# Allegro board SENTINEL_FALL_V01.brd
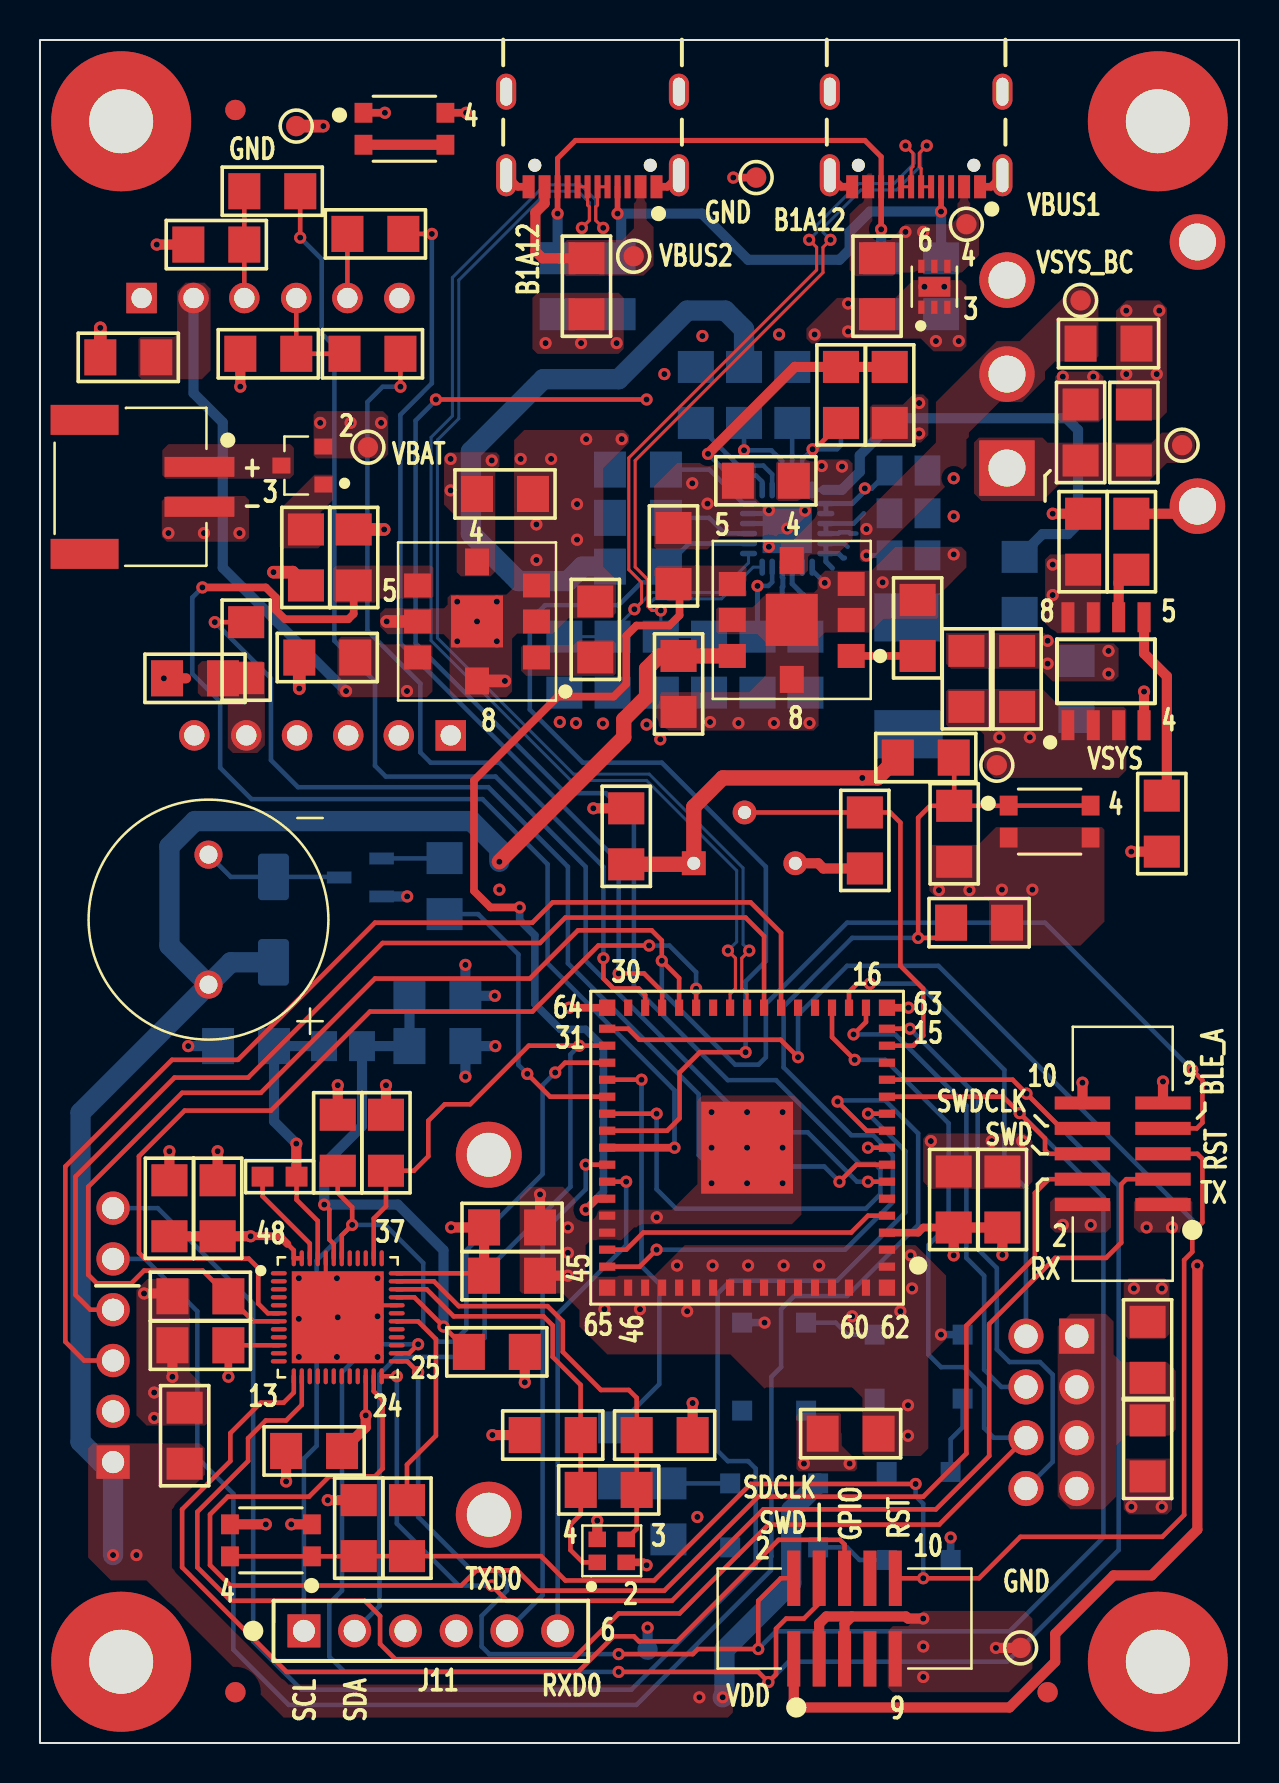
[diagram p0: board, top side]
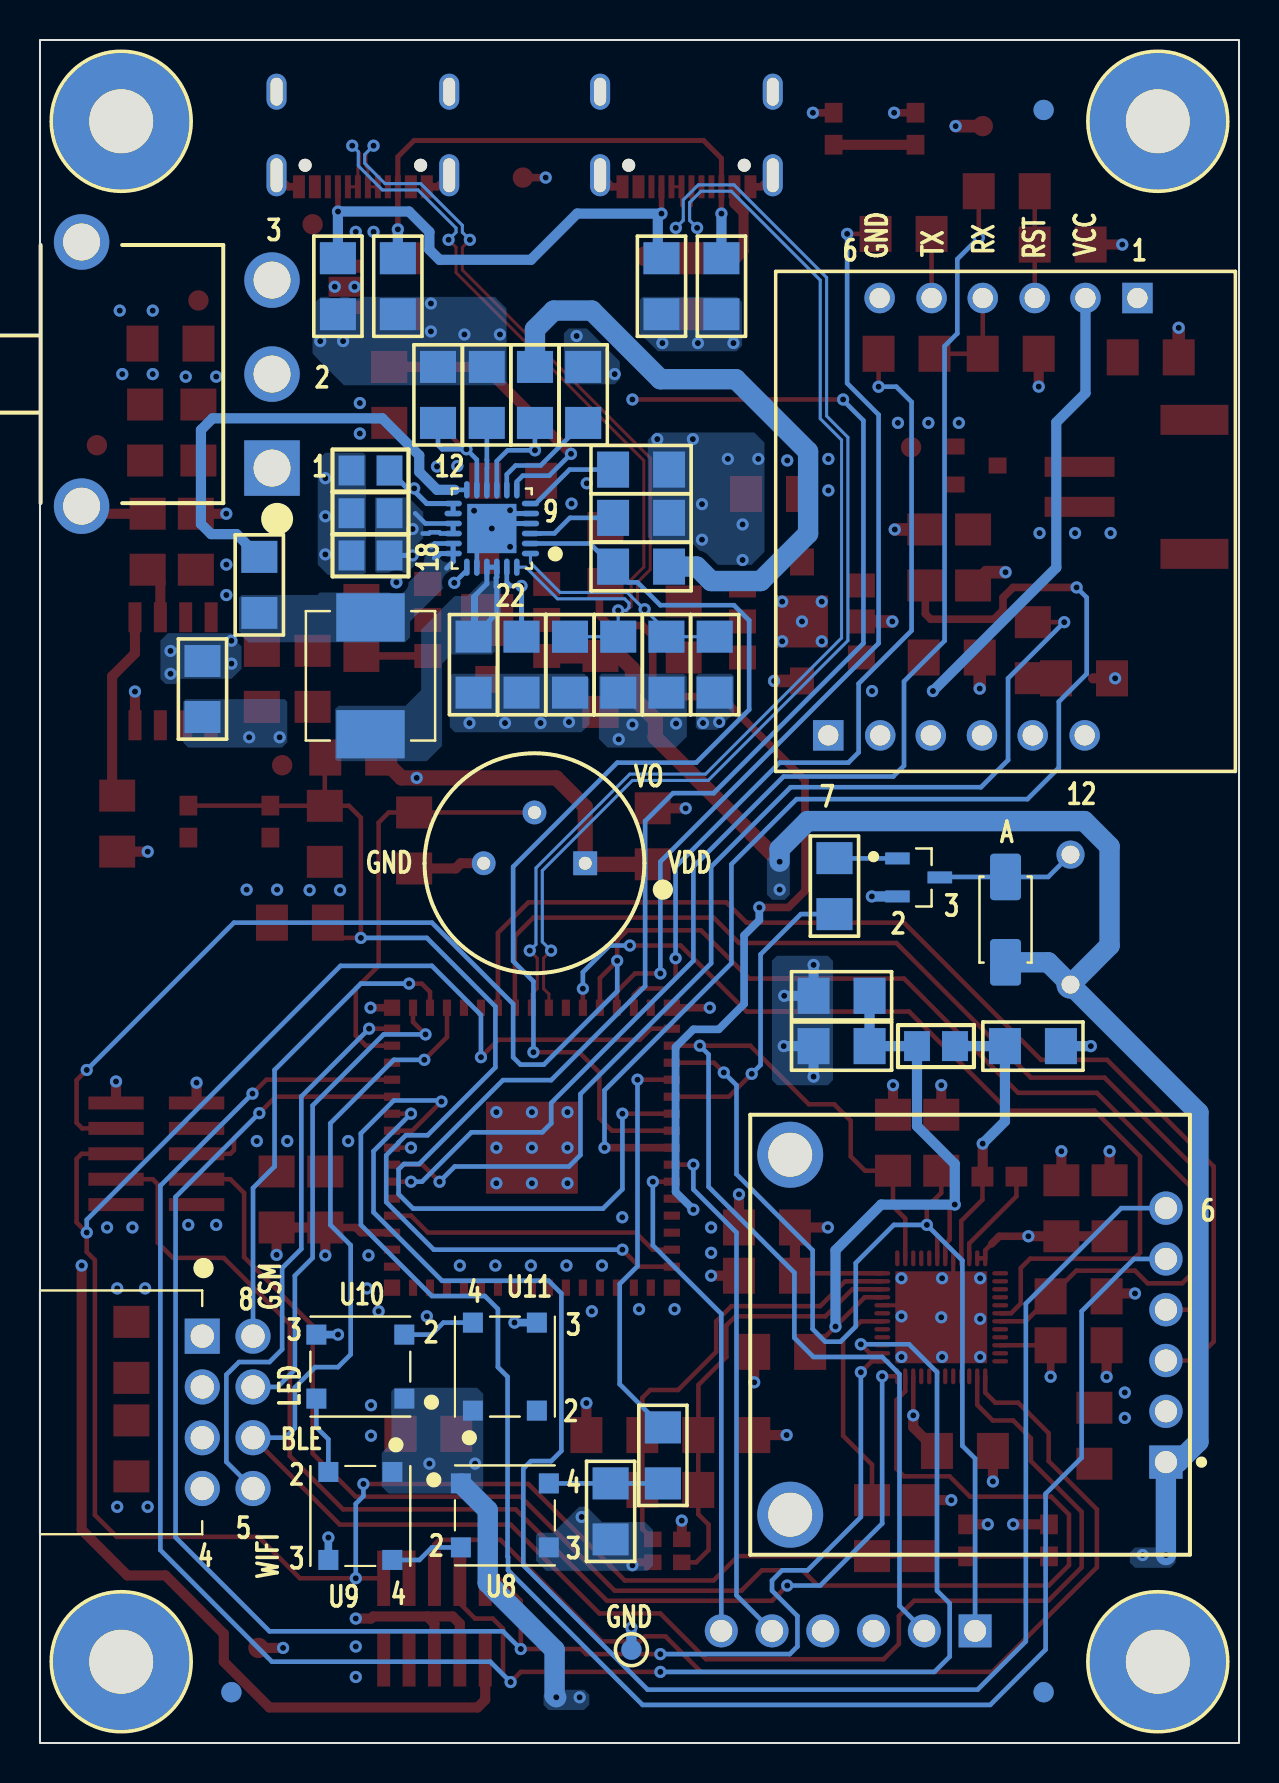
[diagram p1: board, bottom side, seen from below]

Outline 60 x 85.16 mm; copper layers: TOP, GND, GND/PWR, BOTTOM. Coordinates in mm from the lower left corner of the outline.
Outline path: rectangle 0,0 60,85.16

## Design rules (mm)
constraint set DEFAULT: min track width 0.229
net group DIFFPAIR0: nets PGM_D+ PGM_D-
net group DIFFPAIR1: nets POWER_D+ POWER_D-
nets with their own width: min track width 0.203; nets GND
nets with their own width: min track width 0.229; nets VLDO_3V3
nets with their own width: min track width 0.762; nets VSW_5V0

## Placement (name value [footprint] x y rotation side)
C1  10uF  [C1206]  41.88 72.85 270 top
C2  1uF  [C1206]  35.9 53.92 270 bottom
C3  4.7uF  [C1206]  53.47 69.98 0 top
C4  10uF  [C1206]  38.3 53.92 90 bottom
C5  47nF  [C1206]  49.02 57.91 90 bottom
C6  4.7uF  [C1206]  54.74 65.53 90 top
C7  22uF  [C0805]  43.46 61.49 0 bottom
C8  22uF  [C0805]  43.46 59.39 0 bottom
C9  22uF  [C0805]  43.46 63.63 0 bottom
C10  4.7uF  [C1206]  40.08 67.41 90 bottom
C11  10uF  [C1206]  36.32 63.12 0 top
C12  10uF  [C1206]  23.27 62.46 180 top
C13  47uF  [C1206]  31.95 52.96 270 top
C14  47uF  [C1206]  14.38 54.28 180 top
C15  10uF  [C1206]  52.2 60.07 90 top
C16  100nF  [C1206]  51.87 52.7 90 bottom
C17  1uF  [C1206]  46.35 53.21 90 top
C18  10uF  [C1206]  45.72 27.18 270 top
C20  10uF  [C1206]  48.16 27.18 270 top
C21  10uF  [C1206]  4.42 69.29 0 top
C23  10uF  [C1206]  8.89 26.74 90 top
C24  10uF  [C1206]  13.72 14.61 180 top
C25  100nF  [C1206]  23.62 25.78 0 top
C26  100nF  [C1206]  6.48 26.74 90 top
C27  100nF  [C1206]  23.62 23.37 0 top
C28  100nF  [C1206]  8.03 19.89 180 top
C29  2.2uF  [C1206]  10.31 34.85 180 bottom
C30  100nF  [C1206]  15.95 10.74 90 top
C31  2.2uF  [C1206]  22.86 19.56 0 top
C32  10nF  [C1206]  19.89 37.36 0 bottom
C33  18pF  [C1206]  19.89 34.85 0 bottom
C35  18pF  [C1206]  25.66 15.4 180 top
C36  18pF  [C1206]  31.26 15.4 0 top
C37  10uF  [C1206]  27.34 72.85 270 top
C38  10uF  [C1206]  45.75 45.47 90 top
C39  10uF  [C1206]  48.9 53.21 270 top
C71  10uF  [C1206]  40.56 15.47 0 top
C72  10uF  [C1206]  29.34 45.34 270 top
C73  4.7uF  [C1206]  55.42 14.73 90 top
C74  100nF  [C1206]  54.61 60.07 90 top
C75  10uF  [C1206]  7.24 15.37 270 top
C76  100nF  [C1206]  46.99 41.02 0 top
D2  DIODE  [DIOM5226X230N]  11.68 41.17 90 bottom
FB1  120R, 0.2A  [F0805]  15.16 34.85 0 bottom
FD1  TEST POINT_SMD  [40-T_GLOBAL_FID]  9.78 2.54 0 top
FD2  TEST POINT_SMD  [40-T_GLOBAL_FID]  9.78 2.54 180 bottom
FD3  TEST POINT_SMD  [40-T_GLOBAL_FID]  50.42 2.54 180 bottom
FD4  TEST POINT_SMD  [40-T_GLOBAL_FID]  50.42 2.54 0 top
FD5  TEST POINT_SMD  [40-T_GLOBAL_FID]  9.78 81.66 0 top
FD6  TEST POINT_SMD  [40-T_GLOBAL_FID]  9.78 81.66 180 bottom
J1  USB4105-GF-A  [GCT_USB4105-GF-A]  43.84 82.58 180 top
J5  2X5 HDR JLINK  [CNC_3220-10-0300-00]  54.18 29.46 90 top
J6  2X5 HDR JLINK  [CNC_3220-10-0300-00]  40.26 6.22 0 top
J7  HEADER 2/SM_5  [JST_S2B-PH-SM4-TB]  7.98 62.81 90 top
J8  USB4105-GF-A  [GCT_USB4105-GF-A]  27.65 82.58 180 top
J11  PH1-06-UA  [HDRV6W64P0X254_1X6_1524X250X952P]  13.21 5.61 0 top
L1  1uH  [IND_IHLP2525CZER1R0M01]  43.46 53.37 90 bottom
L2  4.7uH  [L0603]  11.99 28.32 0 top
NOREF  -  []  60 0 90 top
NOREF#2  -  []  0 0 0 top
R2  10K  [R1206]  42.09 72.85 270 bottom
R3  10K  [R1206]  45.09 72.85 270 bottom
R4  4K7  [R1206]  29.92 58.83 0 bottom
R5  4K7  [R1206]  35.23 67.41 270 bottom
R6  4K7  [R1206]  28.65 53.92 90 bottom
R7  4K7  [R1206]  31.06 53.92 90 bottom
R8  4K7  [R1206]  26.24 53.92 270 bottom
R9  4K7  [R1206]  33.48 53.92 270 bottom
R10  0R  [R1206]  32.82 67.41 90 bottom
R11  1M  [R1206]  29.92 63.68 180 bottom
R12  4K7  [R1206]  37.64 67.41 90 bottom
R13  0R  [R1206]  29.92 61.26 180 bottom
R14  10K  [R1206]  40.08 67.41 90 top
R15  10K  [R1206]  42.52 67.41 270 top
R16  4K7  [R1206]  31.7 59.36 90 top
R17  1.05K, 0p1%  [R1206]  43.92 55.76 90 top
R18  6.8K,0p1%  [R1206]  27.79 55.68 90 top
R19  4K7  [R1206]  15.7 59.28 90 top
R23  1K  [R1206]  31.45 11.58 270 bottom
R24  4K7  [R1206]  44.32 49.28 0 top
R26  100R  [R1206]  20.24 42.85 90 bottom
R27  4K7  [R1206]  18.36 10.74 270 top
R28  4K7  [R1206]  14.9 30.02 90 top
R29  4K7  [R1206]  17.31 30.02 90 top
R30  4K7  [R1206]  55.42 19.66 270 top
R31  1M  [R1206]  28.46 12.66 0 top
R32  10K  [R1206]  13.31 59.28 270 top
R33  10K  [R1206]  25.9 72.85 270 bottom
R34  10K  [R1206]  28.9 72.85 270 bottom
R35  4K7  [R1206]  8.03 22.34 180 top
R36  500m  [R1206]  52.07 65.53 90 top
R37  1K  [R1206]  16.78 75.46 180 top
R39  1K  [R1206]  16.64 69.47 180 top
R40  1K  [R1206]  11.62 77.6 0 top
R41  1K  [R1206]  10.32 54.65 90 top
R42  5k6  [R1206]  11.42 69.47 0 top
R43  5k6  [R1206]  8.82 74.93 0 top
R44  5k6  [R1206]  7.76 53.24 0 top
R45  1K  [R1206]  41.27 45.13 90 top
R46  4K7  [R1206]  56.13 45.97 270 top
R47  100R  [R1206]  28.83 14.38 270 bottom
SW1  -  [500SSP3S1M6QEA]  48.39 63.75 270 bottom
SW6  SW_TC_SPST_1  [KMR221_CNK]  50.52 46.08 0 top
SW7  SW_TC_SPST_1  [KMR221_CNK]  18.24 80.72 0 top
SW8  SW_TC_SPST_1  [KMR221_CNK]  11.56 10.13 180 top
SW9  -  [BD04AV]  51.88 20.35 270 bottom
TP2  TEST POINT_2  [TP40]  46.35 75.95 0 top
TP3  TEST POINT_2  [TP40]  52.07 72.14 180 top
TP4  TEST POINT_2  [TP40]  12.82 80.85 0 top
TP6  T POINT R  [MH7P5_3P2T]  4.06 81.1 0 top
TP12  TEST POINT_2  [TP40]  16.41 64.8 0 top
TP13  TEST POINT_2  [TP40]  29.71 74.35 0 top
TP14  TEST POINT_2  [TP40]  30.4 4.67 0 bottom
TP15  TEST POINT_2  [TP40]  49.07 4.76 0 top
TP16  TEST POINT_2  [TP40]  35.83 78.28 0 top
TP17  T POINT R  [MH7P5_3P2T]  4.06 4.06 0 top
TP18  T POINT R  [MH7P5_3P2T]  55.93 81.1 0 top
TP19  T POINT R  [MH7P5_3P2T]  55.93 4.06 0 top
TP20  TEST POINT_2  [TP40]  57.15 64.9 0 top
TP21  TEST POINT_2  [TP40]  47.88 48.9 0 top
U1  TVS DIODE  [SON65P200X200X80-7N]  44.75 72.82 90 top
U2  BQ25886RGE  [QFN50P400X400X100-25N]  37.39 60.73 0 bottom
U3  MYLSM00502ERPL  [MURATA_MYLSM00502ERPL]  37.62 56.16 180 top
U4  MYLSM00502ERPL  [MURATA_MYLSM00502ERPL]  21.87 56.08 180 top
U5  MCP1727-3302ESN  [SOIC127P600X175-8N]  53.34 53.59 90 top
U6  ESP32-S3-MINI  [ESP32-S3-MINI-1U_EXP]  35.38 29.77 180 top
U7  -  [SIM8000L]  17.98 50.39 90 bottom
U8  IN-PI55QATPRPGPBPW-40  [INPI55QATPRPGPBPW30]  36.74 11.38 180 bottom
U9  IN-PI55QATPRPGPBPW-40  [INPI55QATPRPGPBPW30]  43.97 11.35 270 bottom
U10  IN-PI55QATPRPGPBPW-40  [INPI55QATPRPGPBPW30]  43.97 18.82 0 bottom
U11  IN-PI55QATPRPGPBPW-40  [INPI55QATPRPGPBPW30]  36.74 18.82 90 bottom
U12  BC818-40LT1G  [SOT95P237X111-3N]  16.03 43.28 180 bottom
U13  AT-1224-TWT-5V-2-R  [XDCR_AT-1224-TWT-5V-2-R]  8.43 41.17 180 top
U14  NRF54L15-QFAA-R  [QFN40P600X600X90-49N]  14.9 21.29 0 top
U15  -  [SEN0623]  3.66 14.05 0 bottom
U16  -  [EKMB1101111]  32.72 43.99 180 bottom
U17  SSM3J332R  [SOT95P240X88-3N]  13.13 63.88 90 top
X1  32 MHz  [XTAL_ABM11W-330000MHZ-8-D1X-T3]  28.61 9.61 90 top

## Library data of the parts
C1 C37 = CAP_CER_10uF_50V_1206_X7R_10P
C2 C17 = CAP_1UF_25V_1206_10P0
C3 C6 C10 C73 = CAP_CER_4700nF_50V_X7R_1206
C4 C11 C12 C15 C18 C20 C21 C23 C24 C38 C39 C71 C72 C75 = CAP_10UF_50V X7T_1206
C5 = 8_CAP_47nF_1206
C7-C9 = 4_CAP_ 22uF 20% X5R_0805 35VDC
C13 C14 = CAP_CER_47UF_16V_X5R_1206
C16 C25-C28 C30 C74 C76 = CAP_100nF_50V_1206_X7R
C29 C31 = CAP_CER_2.2UF_16V_X7R_1206
C32 = 7_CAP_10nF_10p_50V
C33 C35 C36 = CAP_18PF_125V_1206
D2 = B260A-13-F
FB1 = FB_120R_200mA_0805
FD1-FD6 = TEST POINT_SMD_0: room: NTBM
J1 J8 = CONN_USB_USB4105-GF-A
J5 J6 = HEADER_10_2X5_SHROUDED
J7 = HEADER 2/SM_5
J11 = HEADER_6_6X1_MALE
L1 = IND_1uH_11A_1_ukpkg
L2 = IND_4.7UH_350MA_500MOHM_SM
R2 R3 R14 R15 R32-R34 = RES_10K_1W4_1P0_1206
R4-R9 R12 R16 R19 R24 R27-R30 R35 R46 = RES_4K7_1W4_1P0_1206
R10 R13 = RES_0R0_1W4_1P0_1206
R11 R31 = RES_1M_1W2_0P1_1206
R17 = RES_1P05K_0W52_0P1_1206
R18 = RES_6P8K_1W4_0P1_1206
R23 R37 R39-R41 R45 = RES_1K_1W4_1P0_1206
R26 R47 = RES_100R_1W8_1P0_1206
R36 = RES_500mOHM_1W2_1P0_1206
R42-R44 = RES_GENRIC_5k6_1W4_1P0_1206
SW1 = SWITH_PWR_RA_0
SW6-SW8 = SW_TC_SPST_1: Tolerance: TOL; User Part Number: PN
SW9 = SW_RA_DIP
TP2-TP4 TP12-TP16 TP20 TP21 = TEST POINT_2
TP6 TP17-TP19 = T POINT R
U1 = IC_TVS_DIODE
U2 = BQ25886RGER
U3 U4 = MYLSM00502ERPL
U5 = MCP1727-3302ESN
U6 = ESP32-S3-MINI
U7 = SIP_IC_SIM800L_0
U8-U11 = IN-PI55QATPRPGPBPW-40
U12 = NPN_TRANSISTOR_BC818-40LT1G
U13 = BUZZER_AT-1224-TWT-5V-2-R
U14 = NRF54L15-QFAA-R
U15 = SIP_SEN0623
U16 = PIR_SIP_EKMB1101111
U17 = SSM3J332R,LF
X1 = XTAL_32MHZ

## Footprints (pads in the part's own frame, mm; a bottom-side part is the same pattern mirrored in y, then rotated)
40-T_GLOBAL_FID
  round 1.016 smd: 1(0,0)
500SSP3S1M6QEA
  rect 2.775x2.775 hole 1.85: 1(0,0)
  round 2.775 hole 1.85: 2(-4.7,0) 3(-9.4,0) MH1(1.905,-9.53) MH2(-11.305,-9.53)
BD04AV
  rect 1.755x1.755 hole 1.17: 1(0,0)
  round 1.755 hole 1.17: 2(2.54,0) 3(5.08,0) 4(7.62,0) 5(7.62,2.54) 6(5.08,2.54) 7(2.54,2.54) 8(0,2.54)
C0805
  rect 1.295x1.499 smd: 1(-0.95,0) 2(0.95,0)
C1206
  rect 1.6x1.803 smd: 1(-1.4,0) 2(1.4,0)
CNC_3220-10-0300-00
  rect 0.65x2.77 smd: 1(-2.54,-2.015) 2(-2.54,2.015) 3(-1.27,-2.015) 4(-1.27,2.015) 5(0,-2.015) 6(0,2.015) 7(1.27,-2.015) 8(1.27,2.015) 9(2.54,-2.015) 10(2.54,2.015)
DIOM5226X230N
  custom 2.33x1.55 smd: 1(-2.135,0) 2(2.135,0)
EKMB1101111
  rect 1.192x1.192 hole 0.65: 1(0,0)
  round 1.192 hole 0.65: 2(-2.54,2.54) 3(-5.08,0)
ESP32-S3-MINI-1U_EXP
  rect 0.813x0.406 smd: 1(-7,5.95) 2(-7,5.1) 3(-7,4.25) 4(-7,3.4) 5(-7,2.55) 6(-7,1.7) 7(-7,0.85) 8(-7,0) 9(-7,-0.85) 10(-7,-1.7) 11(-7,-2.55) 12(-7,-3.4) 13(-7,-4.25) 14(-7,-5.1) 15(-7,-5.95) 31(7,-5.95) 32(7,-5.1) 33(7,-4.25) 34(7,-3.4) 35(7,-2.55) 36(7,-1.7) 37(7,-0.85) 38(7,0) 39(7,0.85) 40(7,1.7) 41(7,2.55) 42(7,3.4) 43(7,4.25) 44(7,5.1) 45(7,5.95)
  rect 0.406x0.813 smd: 16(-5.95,-7) 17(-5.1,-7) 18(-4.25,-7) 19(-3.4,-7) 20(-2.55,-7) 21(-1.7,-7) 22(-0.85,-7) 23(0,-7) 24(0.85,-7) 25(1.7,-7) 26(2.55,-7) 27(3.4,-7) 28(4.25,-7) 29(5.1,-7) 30(5.95,-7) 46(5.95,7) 47(5.1,7) 48(4.25,7) 49(3.4,7) 50(2.55,7) 51(1.7,7) 52(0.85,7) 53(0,7) 54(-0.85,7) 55(-1.7,7) 56(-2.55,7) 57(-3.4,7) 58(-4.25,7) 59(-5.1,7) 60(-5.95,7)
  rect 4.6x4.6 smd: 61(0,0)
  rect 0.813x0.813 smd: 62(-7,7) 63(-7,-7) 64(7,-7) 65(7,7)
F0805
  rect 1.295x1.499 smd: 1(-0.95,0) 2(0.95,0)
GCT_USB4105-GF-A
  round 0.65 hole 0.65 unplated: (-2.89,3.68) (2.89,3.68)
  rect 0.6x1.15 smd: A1B12(-3.2,4.755) A4B9(-2.4,4.755) B1A12(3.2,4.755) B4A9(2.4,4.755)
  rect 0.3x1.15 smd: A5(-1.25,4.755) A6(-0.25,4.755) A7(0.25,4.755) A8(1.25,4.755) B5(1.75,4.755) B6(0.75,4.755) B7(-0.75,4.755) B8(-1.75,4.755)
  oval 1x2.1 hole 0.6x1.7: S1(-4.32,4.18) S2(4.32,4.18)
  oval 1x1.8 hole 0.6x1.4: S3(-4.32,0) S4(4.32,0)
HDRV6W64P0X254_1X6_1524X250X952P
  rect 1.65x1.65 hole 1.1: 1(0,0)
  round 1.65 hole 1.1: 2(2.54,0) 3(5.08,0) 4(7.62,0) 5(10.16,0) 6(12.7,0)
IND_IHLP2525CZER1R0M01
  rect 2.413x3.429 smd: 1(-2.921,0) 2(2.921,0)
INPI55QATPRPGPBPW30
  rect 1x1 smd: 1(-2.2,1.6) 2(-2.2,-1.6) 3(2.2,-1.6) 4(2.2,1.6)
JST_S2B-PH-SM4-TB
  rect 1.5x3.4 smd: (-3.35,5.75) (3.35,5.75)
  rect 1x3.5 smd: 1(1,0) 2(-1,0)
KMR221_CNK
  rect 0.889x0.991 smd: 1(-2.05,0.8) 2(-2.05,-0.8) 3(2.05,-0.8) 4(2.05,0.8)
L0603
  rect 1.092x0.991 smd: 1(-0.85,0) 2(0.85,0)
MH7P5_3P2T
  round 7 hole 3.2: 1(0,0)
MURATA_MYLSM00502ERPL
  rect 1.35x1.2 smd: 1(-2.975,1.8) 2(-2.975,0) 3(-2.975,-1.8) 5(2.975,-1.8) 6(2.975,0) 7(2.975,1.8)
  rect 1.2x1.35 smd: 4(0,-2.975) 8(0,2.975)
  rect 2.6x2.6 smd: 9(0,0)
QFN40P600X600X90-49N
  oval 0.8x0.216 smd: 1(-2.95,2.2) 2(-2.95,1.8) 3(-2.95,1.4) 4(-2.95,1) 5(-2.95,0.6) 6(-2.95,0.2) 7(-2.95,-0.2) 8(-2.95,-0.6) 9(-2.95,-1) 10(-2.95,-1.4) 11(-2.95,-1.8) 12(-2.95,-2.2) 25(2.95,-2.2) 26(2.95,-1.8) 27(2.95,-1.4) 28(2.95,-1) 29(2.95,-0.6) 30(2.95,-0.2) 31(2.95,0.2) 32(2.95,0.6) 33(2.95,1) 34(2.95,1.4) 35(2.95,1.8) 36(2.95,2.2)
  oval 0.216x0.8 smd: 13(-2.2,-2.95) 14(-1.8,-2.95) 15(-1.4,-2.95) 16(-1,-2.95) 17(-0.6,-2.95) 18(-0.2,-2.95) 19(0.2,-2.95) 20(0.6,-2.95) 21(1,-2.95) 22(1.4,-2.95) 23(1.8,-2.95) 24(2.2,-2.95) 37(2.2,2.95) 38(1.8,2.95) 39(1.4,2.95) 40(1,2.95) 41(0.6,2.95) 42(0.2,2.95) 43(-0.2,2.95) 44(-0.6,2.95) 45(-1,2.95) 46(-1.4,2.95) 47(-1.8,2.95) 48(-2.2,2.95)
  rect 4.6x4.6 smd: 49(0,0)
QFN50P400X400X100-25N
  oval 0.864x0.279 smd: 1(-1.935,1.25) 2(-1.935,0.75) 3(-1.935,0.25) 4(-1.935,-0.25) 5(-1.935,-0.75) 6(-1.935,-1.25) 13(1.935,-1.25) 14(1.935,-0.75) 15(1.935,-0.25) 16(1.935,0.25) 17(1.935,0.75) 18(1.935,1.25)
  oval 0.279x0.864 smd: 7(-1.25,-1.935) 8(-0.75,-1.935) 9(-0.25,-1.935) 10(0.25,-1.935) 11(0.75,-1.935) 12(1.25,-1.935) 19(1.25,1.935) 20(0.75,1.935) 21(0.25,1.935) 22(-0.25,1.935) 23(-0.75,1.935) 24(-1.25,1.935)
  rect 2.464x2.464 smd: 25(0,0)
R1206
  rect 1.6x1.803 smd: 1(-1.4,0) 2(1.4,0)
SEN0623
  rect 1.665x1.665 hole 1.11: 1(0,0)
  round 1.665 hole 1.11: 2(0,-2.54) 3(0,-5.08) 4(0,-7.62) 5(0,-10.16) 6(0,-12.7)
  round 3.3 hole 2.2: 7(18.8,-15.37) 8(18.8,2.63)
SIM8000L
  rect 1.524x1.524 hole 1.016: 1(21.87,-12.9) 7(0,2.57)
  round 1.524 hole 1.016: 2(21.87,-10.3) 3(21.87,-7.76) 4(21.87,-5.16) 5(21.87,-2.6) 6(21.87,0) 8(0,-0.03) 9(0,-2.56) 10(0,-5.12) 11(0,-7.66) 12(0,-10.26)
SOIC127P600X175-8N
  rect 1.5x0.65 smd: 1(-2.7,1.905) 2(-2.7,0.635) 3(-2.7,-0.635) 4(-2.7,-1.905) 5(2.7,-1.905) 6(2.7,-0.635) 7(2.7,0.635) 8(2.7,1.905)
SON65P200X200X80-7N
  rect 0.66x0.32 smd: 1(-1.025,0.65) 2(-1.025,0) 3(-1.025,-0.65) 4(1.025,-0.65) 5(1.025,0) 6(1.025,0.65)
  rect 1x1.6 smd: 7(0,0)
SOT95P237X111-3N
  rect 1.232x0.597 smd: 1(-1.06,0.95) 2(-1.06,-0.95) 3(1.06,0)
SOT95P240X88-3N
  rect 0.8x0.9 smd: 1(-0.95,-1.05) 2(0.95,-1.05) 3(0,1.05)
TP40
  round 1.02 smd: 1(0,0)
XDCR_AT-1224-TWT-5V-2-R
  round 1.408 hole 0.9: 1(0,3.25) 2(0,-3.25)
XTAL_ABM11W-330000MHZ-8-D1X-T3
  rect 0.775x0.875 smd: 1(-0.575,0.725) 2(-0.575,-0.725) 3(0.575,-0.725) 4(0.575,0.725)

## Nets
GND: C1.2 C2.2 C3.2 C4.1 C6.2 C7.2 C8.2 C9.2 C10.2 C11.1 C12.1 C13.2 C14.2 C15.2 C16.2 C17.2 C18.1 C20.1 C21.1 C23.2 C24.2 C25.2 C26.2 C27.2 C28.2 C29.2 C30.2 C31.2 C32.2 C33.2 C35.2 C36.2 C37.2 C38.1 C39.1 C71.2 C72.1 C73.1 C74.2 C75.1 C76.2 J1.A1B12 J1.B1A12 J1.S1 J1.S2 J1.S3 J1.S4 J5.9 J5.10 J6.3 J6.5 J6.9 J7.2 J8.A1B12 J8.B1A12 J8.S1 J8.S2 J8.S3 J8.S4 J11.3 J11.4 R2.2 R3.2 R8.2 R9.2 R10.2 R11.2 R12.2 R13.2 R15.2 R16.2 R17.2 R18.2 R19.2 R23.2 R32.2 R33.2 R34.2 R35.2 R42.1 R43.1 R44.1 R45.1 SW1.MH1 SW1.MH2 SW6.2 SW6.3 SW7.1 SW7.4 SW8.2 SW8.3 TP4.1 TP6.1(TP) TP14.1 TP15.1 TP16.1 TP17.1(TP) TP18.1(TP) TP19.1(TP) U1.1 U1.2 U1.3 U1.7 U2.4 U2.5 U2.19 U2.20 U2.25 U3.2 U3.3 U3.6 U3.8 U3.9 U4.2 U4.3 U4.6 U4.8 U4.9 U5.4 U6.1 U6.2 U6.42 U6.43 U6.46 U6.47 U6.48 U6.49 U6.50 U6.51 U6.52 U6.53 U6.54 U6.55 U6.56 U6.57 U6.58 U6.59 U6.60 U6.61 U6.62 U6.63 U6.64 U6.65 U7.6 U8.3(VSS) U9.3(VSS) U10.3(VSS) U11.3(VSS) U12.2(EMITTER) U14.32 U14.44 U14.49 U15.2 U15.7 U15.8 U16.3 X1.2 X1.4
VBAT: C9.1 TP12.1 U2.13 U2.14 U17.2(SOURCE)
VBAT_CONN: J7.1(PWR) U17.3
VBUS: C1.1 C2.1 J1.A4B9 J1.B4A9(VBUS02) R6.1 R7.1 TP2.1 U1.4 U1.5(IN_3) U1.6 U2.23
VBUS_USB2: C37.1 J8.A4B9 J8.B4A9(VBUS02) TP13.1
BLE_OFF: SW9.6 U6.18 U14.14
CC1: J1.A5 J8.A5 R3.1 R34.1
CC2: J1.B5 J8.B5 R2.1 R33.1
ESP_BOOT0: SW7.2 SW7.3
ESP_BOOT0_USB: U6.4 U6.44
ESP_BUZZER_OP: R26.1 U6.35
ESP_DEBG_RXD0: J11.6 U6.40
ESP_DEBG_TXD0: J11.5 U6.39(TXD0)
ESP_EN_4V0: R19.1 U4.5 U6.38
ESP_EN_5V0: R16.1 U3.5 U6.41
ESP_GPIO3_RADAR: U6.9 U15.5
ESP_GPIO4_RADAR: U6.10 U15.6
ESP_NRF_GPIO1_BLEALERT: J5.7 R35.1 U6.27 U14.7
ESP_NRF_GPIO2: U6.26 U14.6
ESP_NRF_RESET: C30.1 J5.5 J6.10 R27.2 SW8.1 SW8.4 U6.31
ESP_PG_N: R5.2 U2.9 U6.36
ESP_PIR_SENSE: R45.2 U6.14 U16.2(VOUT)
ESP_RESET: C38.2 C76.1 R24.2 SW6.1 SW6.4 U6.45
ESP_SIM_DTR: R41.2 U6.7
ESP_SIM_RST: R40.2 U6.6
ESP_SMART_LED_OP: R47.1 U6.34
ESP_STAT: R4.2 U2.2 U6.37
ESP_UART1_RXD: U6.22 U15.4
ESP_UART1_TXD: U6.21 U15.3
ESP_UART2_RXD: R37.1 U6.28
ESP_UART2_TXD: R39.1 U6.29
GSM_OFF: SW9.8 U6.17
I2C_SCL: J11.1 R28.1 U6.33 U14.42
I2C_SDA: J11.2 R29.1 U6.32 U14.38
LED_BUZZER_OFF: SW9.7(NO3) U6.16
NRF_GPIO1: J6.6 U14.13
NRF_RXD: J5.4 U14.23
NRF_SWDCLK: J5.8 J6.4 U6.12 U14.26
NRF_SWDIO: J5.6 J6.2 U6.11 U14.25
NRF_TXD: J5.3 U14.24
NRF_XTAL1: C35.1 R31.1 U14.34 X1.1
NRF_XTAL2: C36.1 R31.2 U14.35(XC2) X1.3(XTAL2)
PGM_D+: J8.A6 J8.B7 U6.24
PGM_D-: J8.A7 J8.B6 U6.23
POWER_D+: J1.A6 J1.B7 R7.2 R9.1 U2.24
POWER_D-: J1.A7 J1.B6 R6.2 R8.1 U2.1
VLDO_3V3: C15.1 C18.2 C20.2 C23.1 C24.1 C25.1 C26.1 C27.1 C28.1 C72.2 J5.1 J5.2 J6.1 R24.1 R28.2 R29.2 R30.1 R46.2 U5.7 U5.8(VOUT) U6.3 U14.10 U14.22 U14.36 U14.47 U14.48 U16.1
VREGN_DIV: R14.2 R15.1 U2.7
VSW_3V3: R4.1 R5.1
VSW_4V0: C14.1 C21.2 U4.7(VO) U7.2(VCC)
VSW_5V0: C13.1 C71.1 C75.2 D2.1 U3.7(VO) U8.1 U9.1 U10.1 U11.1 U13.1 U15.1(VIN)
VSYS: C11.2 C12.2 C16.1 C17.1 C39.2 R36.2 TP21.1 U3.4 U4.4 U5.1 U5.2 U5.3
VSYS_BC: C3.1 C7.1 C8.1 SW1.2 TP3.1 U2.15 U2.16
WIFI_OFF: SW9.5 U6.15
N489525: C4.2 L1.1 U2.21 U2.22
N489966: C5.1 L1.2 U2.17 U2.18
N490283: C5.2 U2.12
N491328: R10.1 U2.8
N491337: R11.1 U2.6(VSET)
N491346: R12.1 U2.10
N491858: C10.1 R14.1 U2.11
N492759: R13.1 U2.3
N505816: R18.1 U4.1
N505904: R17.1 U3.1
N533307: U8.2 U9.4
N533315: U9.2 U10.4
N536197: U10.2 U11.4
N548982: L2.1 U14.46
N549115: C29.1 FB1.1 L2.2 U14.45
N549518: C31.1 C32.1 C33.1 FB1.2 U14.33 U14.43
N550099: R27.1 U14.30
N554154: R23.1 R47.2 U8.4
N569514: C6.1 R36.1 SW1.1 TP20.1
N570476: C73.2 R30.2 SW9.1 SW9.2 SW9.3 SW9.4
N633379: R32.1 U17.1
N742009: D2.2 U12.3 U13.2
N742588: R26.2 U12.1
N763037: R37.2 U7.5
N763041: R39.2 R42.2 U7.4
N763585: R40.1 R43.2 U7.3
N763595: R41.1 R44.2 U7.11
N878198: C74.1 U5.6
N878334: R46.1 U5.5

Pads without a net: FD1 1; FD2 1; FD3 1; FD4 1; FD5 1; FD6 1; J1 A8 B8; J6 7 8; J8 A8 B8; SW1 3; U6 5 8 13 19 20 25 30; U7 1 7 8 9 10 12; U11 2; U14 1 2 3 4 5 8 9 11 12 15 16 17 18 19 20 21 27 28 29 31 37 39 40 41

## Via types
v1: diameter 0.61, hole 0.305, TOP to BOTTOM, 272 vias

## Routing (per net, layer and track width the routed paths; a pad name or vN(x,y) marks a point on that pad's centre or on a via; arc(x,y) is an arc through that point)
GND: length 95.6
  TOP w0.203: v1(16.89,21.34) 16.89,21.69 17.09,21.89 U14.32 ; v1(14.86,23.24) 14.5,23.24 14.3,23.44 U14.44
  TOP w0.381: J1.S2 40.1,77.82 J1.B1A12 ; J8.B1A12 23.9,77.82 J8.S2 ; J8.S1 31.39,77.82 J8.A1B12 ; v1(30.35,8.89) 30.21,9.03 X1.2 ; J1.S1 47.59,77.82 J1.A1B12 ; SW7.1 v1(17.26,81.52) ; U6.64 v1(26.48,36.77) ; SW7.4 v1(21.32,81.52) ; TP16.1 v1(34.69,78.28) ; U6.63 v1(43.46,36.77)
  TOP w0.508: C35.2 v1(22.64,15.4) ; C74.2 57.54,61.47 SW1.MH1 ; U16.3 38.94,43.99 39.2,43.73 R45.1 ; C24.2 v1(12.32,13.08) ; C15.2 v1(50.68,61.47) ; SW8.3 v1(11.3,10.93) ; SW8.2 v1(12.57,10.93) ; 55.24,50.89 v1(55.24,52.58) ; R43.1 v1(5.84,74.93) ; C30.2 v1(14.4,12.14) ; R35.2 6.48,22.48 v1(5.21,22.48) ; C31.2 v1(24.26,18.04) ; X1.4 v1(27.88,11.12) ; C26.2 v1(6.48,29.59) ; C27.2 v1(26.42,23.37) ; 40.62,6.33 40.26,5.97 J6.5 ; 40.62,6.33 43.33,6.33 43.43,6.22 v1(44.2,6.22) ; 40.62,6.33 39.35,6.33 38.99,5.97 J6.3 ; J5.9 v1(56.19,33.08) ; R42.1 v1(10.02,67.83) ; 7.31,53.24 R44.1 v1(6.2,53.24) ; J5.10 v1(52.16,33.02) ; C36.2 v1(32.66,17) ; C23.2 v1(8.89,29.59) ; C25.2 v1(25.02,27.43) ; C28.2 v1(6.63,18.31) ; TP15.1 v1(47.83,4.76) ; C72.1 v1(27.69,46.74)
  TOP w0.635: TP4.1 v1(14.18,80.85) ; v1(11.68,58.55) 12.65,58.55 R32.2 ; R19.2 v1(17.22,60.68) ; C14.2 v1(12.98,52.73) ; U4.6 v1(17.35,56.08) ; C21.1 v1(3.02,70.77) ; U4.8 v1(23.26,53.11)
  BOTTOM w0.229: v1(37.39,60.73) 38.14,59.98 U2.20 ; U2.19 38.64,58.64 v1(39.27,58.01)
  BOTTOM w0.254: U2.4 37.14,60.98 v1(37.39,60.73) ; U2.5 36.31,61.48 v1(36.47,61.65)
  BOTTOM w0.381: U9.3 v1(45.57,10.27) ; U10.3 v1(45.09,20.42) ; U11.3 v1(36.26,21.02)
  BOTTOM w0.508: U12.2 v1(18.37,42.33) ; v1(22.76,37.36) C32.2 v1(21.29,38.91) ; C29.2 v1(7.42,34.85) ; v1(21.29,33.32) C33.2 v1(22.78,34.85) ; TP14.1 v1(30.4,5.77)
  vias: v1(5.71,17.53) v1(5.71,16.26) v1(6.43,60.5) v1(8.2,60.5) v1(9.98,60.5) v1(12.95,23.24) v1(12.95,21.21) v1(12.95,19.3) v1(14.9,21.29) v1(14.86,19.3) v1(16.89,23.24) v1(16.89,19.3) v1(20.88,57.07) v1(20.88,55.09) v1(21.87,56.08) v1(22.86,57.07) v1(22.86,55.09) v1(24.05,64.21) v1(24.84,60.93) v1(24.84,59.16) v1(25.3,70) v1(25.58,64.21) v1(26.01,51.06) v1(26.42,25.78) v1(26.42,24.51) v1(26.82,51) v1(26.87,61.95) v1(26.87,60.17) v1(27.08,70) v1(27.33,65.2) v1(28.24,21.69) v1(28.85,70) v1(29.11,65.2) v1(30.02,21.69) v1(30.86,26.29) v1(31.24,68.45) v1(31.88,23.88) v1(32.38,21.59) v1(32.64,62.99) v1(32.89,11.3) v1(33.15,70.36) v1(33.4,61.98) v1(33.53,51.05) v1(33.6,31.55) v1(33.6,29.77) v1(33.6,27.99) v1(33.66,23.88) v1(34.95,51) v1(35.38,31.55) v1(35.38,29.77) v1(35.38,27.99) v1(35.43,23.88) v1(36.47,59.82) v1(36.73,51) v1(36.98,70.43) v1(37.16,31.55) v1(37.16,29.77) v1(37.16,27.99) v1(37.21,23.88) v1(38.28,61.62) v1(38.51,51) v1(38.76,70.43) v1(38.99,23.88) v1(40.44,71.98) v1(40.44,70.59) v1(40.64,21.34) v1(42.16,58.04) v1(43.05,21.59) v1(43.43,16.89) v1(43.43,15.37) v1(43.56,24.38) v1(43.64,22.73) v1(43.99,67.01) v1(43.99,65.48) v1(44.2,4.83) v1(44.2,3.3) v1(44.26,72.82) v1(44.58,30.1) v1(44.83,70.1) v1(44.98,42.65) v1(45.25,72.82) v1(45.72,63.25) v1(45.72,61.34) v1(45.72,59.44) v1(45.97,70.1) v1(46.51,42.65) v1(47.62,30.1) v1(48.13,42.67) v1(49.15,30.1) v1(49.66,42.67) v1(50.42,55.12) v1(50.42,53.98) v1(53.47,54.61) v1(53.47,53.47) v1(54.36,71.63) v1(54.36,68.45) v1(54.61,11.81) v1(55.88,68.45) v1(56.01,71.63) v1(56.13,11.81)
VBAT: length 4.4
  BOTTOM w0.254: C9.1 41.61,62.74 v1(41.27,62.74) 41.27,62.61 40.65,61.98 U2.13 U2.14
  vias: v1(14.02,66.01) v1(15.54,66.01) v1(17.07,66.01)
VBUS: length 4.1
  BOTTOM w0.229: U2.23 36.64,58.05 36.45,57.86 v1(35.9,57.86)
  BOTTOM w0.254: v1(35.9,57.86) C2.1
  vias: v1(28.17,50.98) v1(30.35,50.93) v1(31.04,50.19) v1(43.31,75.56) v1(44.2,75.56)
VBUS_USB2: length 6.1
  TOP w0.508: J8.B4A9 25.25,76.99 24.79,76.53 24.79,74.6 25.15,74.24 25.98,74.24 25.99,74.25 C37.1
BLE_OFF: length 90
  TOP w0.229: U14.14 13.1,16.91 12.32,16.13 11.3,16.13 10.41,15.24 10.41,14.1 7.87,11.56 7.87,8.78 9.55,7.11 16.26,7.11 17.02,6.35 17.02,4.95 17.78,4.19 26.67,4.19 28.96,6.48 32,6.48 36.45,10.92 44.99,10.92 SW9.6 ; v1(40.77,34.16) 39.63,35.3 U6.18
  BOTTOM w0.229: SW9.6 47.73,15.27 47.24,15.75 47.24,17.78 46.23,18.8 45.09,18.8 44.45,19.43 44.45,24.89 45.47,25.91 45.47,30.99 42.29,34.16 v1(40.77,34.16)
CC1: length 26
  TOP w0.279: J1.A5 45.09,76.59 v1(45.09,76.58) ; J8.A5 v1(28.9,76.48)
  BOTTOM w0.508: R34.1 29.08,74.43 29.08,76.3 v1(28.9,76.48) 33.12,76.48 35.43,74.17 40.01,74.17 40.51,74.68 40.51,75.56 41.53,76.58 v1(45.09,76.58) 45.09,76.58 R3.1
CC2: length 27
  TOP w0.254: J8.B5 25.9,79.24 26.8,80.14 41.27,80.14 42.09,79.32 J1.B5
  TOP w0.279: v1(42.09,75.69) J1.B5 ; v1(25.9,76.48) J8.B5
  BOTTOM w0.508: R33.1 v1(25.9,76.48) ; R2.1 v1(42.09,75.69)
ESP_BOOT0: length 4.1
  TOP w0.508: SW7.2 SW7.3
ESP_BOOT0_USB: length 14.7
  TOP w0.229: U6.4 41.43,26.37 40.59,25.53 30.19,25.53 29.33,24.67 U6.44
ESP_BUZZER_OP: length 15.2
  TOP w0.229: v1(24.38,33.46) 25.53,32.32 U6.35
  BOTTOM w0.229: R26.1 21.92,41.45 23.94,39.43 23.94,33.91 v1(24.38,33.46)
ESP_DEBG_RXD0: length 24.8
  TOP w0.229: U6.40 v1(29.33,28.07)
  BOTTOM w0.229: v1(29.33,28.07) 29.33,24.89 25.91,21.46 J11.6
ESP_DEBG_TXD0: length 26
  TOP w0.229: U6.39 v1(27.3,28.92)
  BOTTOM w0.229: v1(27.3,28.92) 27.3,27.69 25.15,25.53 25.15,7.39 J11.5
ESP_EN_4V0: length 58.5
  TOP w0.381: U6.38 v1(31.75,29.77) ; R19.1 15.7,56.46 15.43,56.19 12.26,56.19 11.81,56.64 11.81,57.28 11.3,57.78 v1(8.13,57.78)
  BOTTOM w0.229: v1(31.75,29.77) 31.75,32.64 25.4,38.99 25.4,43.94 22.14,47.2 10.59,47.2 9.02,48.77 9.02,52.07 7.62,53.47 7.62,57.28 v1(8.13,57.78)
ESP_EN_5V0: length 44.2
  TOP w0.381: v1(24,41.78) 22.54,41.78 21.72,42.61 21.72,48.13 25.91,52.32 28.7,52.32 29.34,52.96 29.34,55.37 29.84,55.88 31.5,55.88 32,56.39 32,57.65 R16.1 ; v1(27.3,26.67) 27.85,27.22 U6.41
  BOTTOM w0.381: v1(27.3,26.67) 28.19,27.56 28.19,34.8 27.3,35.69 26.04,35.69 24.77,36.96 24.77,40.39 24,41.15 v1(24,41.78)
ESP_GPIO3_RADAR: length 88.1
  TOP w0.229: v1(39.91,32.08) 41.37,30.62 U6.9
  BOTTOM w0.229: U15.5 5.26,24.21 7.87,21.59 7.87,14.27 9.68,12.46 9.68,4.67 12.45,1.91 29.84,1.91 36.58,8.64 36.58,9.3 36.6,9.33 36.6,18.31 37.08,18.8 37.08,21.7 37.74,22.35 40.39,22.35 43.94,25.91 43.94,30.48 42.29,32.13 39.96,32.13 v1(39.91,32.08)
ESP_GPIO4_RADAR: length 87.3
  TOP w0.229: U6.10 v1(41.43,31.47)
  BOTTOM w0.229: U15.6 5.89,26.75 10.67,21.97 10.67,5.08 13.08,2.67 29.59,2.67 35.81,8.89 35.81,13.72 35.43,14.1 34.42,14.1 33.91,14.61 33.91,22.48 34.54,23.11 39.88,23.11 43.31,26.54 43.31,29.59 v1(41.43,31.47)
ESP_NRF_GPIO1_BLEALERT: length 95.5
  TOP w0.229: J5.7 57.88,30.73 58.17,31.02 58.17,33.15 v1(57.66,33.66) ; U14.7 10.67,21.09 R35.1 8.14,23.62 5.21,23.62 4.57,22.99 2.84,22.99 2.41,23.42 2.41,27.81 7.11,32.51 11.05,32.51 16.76,38.23 24.51,38.23 26.92,40.64 30.61,40.64 31.11,40.13 v1(31.11,39.12) 31.98,38.25 U6.27
  BOTTOM w0.229: v1(57.66,33.66) 50.29,41.02 40.39,41.02 36.32,36.96 36.32,34.29 35.95,33.92 34.79,33.92 31.11,37.59 v1(31.11,39.12)
ESP_NRF_GPIO2: length 48.7
  TOP w0.229: U14.6 11.4,21.49 10.92,21.97 10.92,23.75 10.45,24.22 5.24,24.22 4.95,24.51 4.95,29.34 7.24,31.62 11.56,31.62 16.51,36.58 24.64,36.58 27.94,39.88 v1(30.48,39.88) ; v1(32.83,37.72) U6.26
  BOTTOM w0.229: v1(32.83,37.72) 32.83,38.54 31.5,39.88 v1(30.48,39.88)
ESP_NRF_RESET: length 116.6
  TOP w0.229: SW8.4 SW8.1 15.94,9.33 C30.1 R27.2 25.07,9.34 26.29,8.13 30.73,8.13 35.56,12.95 v1(43.81,12.95) ; J6.10 v1(44.2,8.24) 46.99,8.24 49.06,10.31 56.16,10.31 57.25,11.4 57.25,24.15 57.66,24.56 v1(57.66,25.53) 58.17,26.04 58.17,29.21 57.91,29.46 J5.5 ; U6.31 29.43,35.72 29.98,35.17 37.06,35.17 v1(37.93,34.3)
  BOTTOM w0.229: v1(57.66,25.53) 57.66,26.16 44.96,38.86 40.39,38.86 37.93,36.41 v1(37.93,34.3) ; v1(44.2,8.24) 44.2,11.96 43.81,12.34 v1(43.81,12.95)
ESP_PG_N: length 92.4
  TOP w0.229: U6.36 v1(30.86,31.47) ; v1(19.81,67.18) v1(30.35,67.18)
  GND/PWR w0.229: v1(35.23,64.64) 32.69,67.18 v1(30.35,67.18)
  BOTTOM w0.229: v1(19.81,67.18) 19.74,67.11 19.74,67.07 18.8,66.13 18.8,54.99 26.29,47.5 28.32,47.5 29.72,46.1 29.72,37.85 34.42,33.15 36.83,33.15 41.02,28.96 41.78,28.96 42.06,28.68 42.06,27.45 41.33,26.72 31.83,26.72 30.86,27.69 v1(30.86,31.47) ; R5.2 v1(35.23,64.64) 36.6,64.64 37.14,64.1 U2.9
ESP_PIR_SENSE: length 21.2
  TOP w0.229: U6.14 43.69,34.87 44.2,35.38 44.2,37.72 43.05,38.86 43.05,46.02 42.55,46.53 R45.2 U16.2
ESP_RESET: length 55.7
  TOP w0.229: v1(30.86,24.67) 30.01,23.82 U6.45 ; C38.2 44.54,46.87 43.94,46.27 v1(43.94,40.26) 44.83,40.26 C76.1 ; C38.2 48.46,46.87 SW6.1 SW6.4 ; C38.2 45.75,49.25 R24.2
  BOTTOM w0.229: v1(30.86,24.67) 40.29,24.67 42.67,27.05 42.67,29.39 42.06,30.01 42.06,30.03 41.69,30.39 40.6,30.39 37.21,33.78 37.21,36.83 40.64,40.26 v1(43.94,40.26)
ESP_SIM_DTR: length 54.2
  TOP w0.229: U6.7 40.86,28.92 v1(40.01,28.07) ; R41.2 v1(8.75,56.05)
  BOTTOM w0.229: v1(8.75,56.05) 11.56,53.24 11.56,49.15 12.91,47.8 22.43,47.8 26.42,43.81 26.42,38.99 32.96,32.45 32.96,29.4 33.53,28.83 39.24,28.83 v1(40.01,28.07)
ESP_SIM_RST: length 67.9
  TOP w0.229: U6.6 v1(41.43,28.07) ; R40.2 13.02,77.59 v1(13.02,75.28)
  BOTTOM w0.229: v1(13.02,75.28) 14.1,74.2 14.1,70.48 14.73,69.85 14.73,55.12 16.76,53.09 16.76,48.87 17.3,48.33 22.79,48.33 27.3,43.82 27.3,39.12 34.42,32 34.42,30.99 34.87,30.54 38.41,30.54 40.88,28.07 v1(41.43,28.07)
ESP_SMART_LED_OP: length 20.4
  TOP w0.229: v1(30.1,33.17) U6.34
  BOTTOM w0.229: R47.1 30.99,17.94 30.99,22.96 30.1,23.84 v1(30.1,33.17)
ESP_STAT: length 51.6
  TOP w0.229: v1(35.31,34.54) 33.02,34.54 32,33.53 32,31.24 31.38,30.62 U6.37
  BOTTOM w0.229: v1(35.31,34.54) 35.31,38.08 36.32,39.1 36.32,43.81 31.11,49.02 27.16,49.02 24.51,51.68 24.51,56.13 25.27,56.9 28.96,56.9 30.1,58.04 30.53,58.04 R4.2 32.48,59.98 U2.2
ESP_UART1_RXD: length 51.9
  TOP w0.229: U15.4 2.52,21.67 1.78,22.41 1.78,28.32 6.73,33.27 10.41,33.27 17.14,40.01 25.02,40.01 26.29,41.27 35.31,41.27 36.23,40.35 U6.22
ESP_UART1_TXD: length 57.2
  TOP w0.229: U15.3 2.21,19.13 1.27,20.07 1.27,28.83 6.6,34.16 9.91,34.16 16.76,41.02 24.64,41.02 25.65,42.04 35.56,42.04 37.08,40.51 U6.21
ESP_UART2_RXD: length 46.9
  TOP w0.229: v1(28.96,38.48) 30.23,38.48 31.13,37.57 U6.28 ; R37.1 v1(19.61,75.46)
  BOTTOM w0.229: v1(19.61,75.46) 19.61,68 18.03,66.42 18.03,54.99 28.96,44.07 v1(28.96,38.48)
ESP_UART2_TXD: length 42.4
  TOP w0.229: v1(28.19,39.24) 28.19,38.23 28.69,37.73 29.96,37.73 30.28,37.41 U6.29 ; R39.1 v1(18.04,67.82)
  BOTTOM w0.229: v1(18.04,67.82) 17.15,67.82 16.38,67.06 16.38,55.63 19.03,52.98 19.03,49.54 19.55,49.02 22.99,49.02 28.19,43.81 v1(28.19,39.24)
GSM_OFF: length 24.3
  TOP w0.229: U6.17 40.48,37.56 40.89,37.97 v1(41.53,37.97)
  BOTTOM w0.229: SW9.8 49.34,27.75 48.26,28.83 48.26,33.66 43.94,37.97 v1(41.53,37.97)
I2C_SCL: length 53.9
  TOP w0.229: R28.1 14.9,27.51 15.62,26.79 v1(15.62,25.91) 15.1,25.39 U14.42 ; v1(25.78,33.53) 26.27,34.02 U6.33
  BOTTOM w0.229: v1(25.78,33.53) 25.15,32.89 25.15,28.45 21.34,24.64 21.34,20.7 20.7,20.07 19.94,20.07 19.18,20.83 19.18,24 17.27,25.91 v1(15.62,25.91) 13.84,24.13 13.84,14.86 13.21,14.22 J11.1
I2C_SDA: length 55.3
  TOP w0.229: U6.32 v1(26.98,34.87) 24.45,34.87 21.53,31.94 20.26,31.94 19.43,31.11 19.43,29.34 18.71,28.62 R29.1 17.31,26.84 16.7,26.23 U14.38
  BOTTOM w0.229: J11.2 16.99,6.85 16.99,18.44 17.85,19.3 21.29,19.3 22.25,20.26 22.25,23.52 26.54,27.81 26.54,34.43 v1(26.98,34.87)
LED_BUZZER_OFF: length 24.7
  TOP w0.229: v1(40.71,35.43) 41.33,36.06 U6.16
  BOTTOM w0.229: v1(40.71,35.43) 42.8,35.43 46.35,31.88 46.35,24.26 47.24,23.37 47.24,18.67 48.11,17.81 SW9.7
Net_8: length 0.9
  TOP w0.229: 42.38,29.77 v1(41.43,29.77)
NRF_GPIO1: length 52.6
  TOP w0.229: J6.6 40.26,9.93 40.03,10.16 36.96,10.16 31.88,5.08 29.97,5.08 29.72,5.33 28.7,5.33 26.92,3.56 12.34,3.56 7.11,8.78 7.11,11.68 9.53,14.1 9.53,15.49 11.05,17.02 12.19,17.02 12.7,17.53 U14.13
NRF_RXD: length 75.9
  TOP w0.229: J5.4 50.47,28.19 49.78,27.5 49.78,24.3 46.35,20.87 46.35,14.48 44.2,12.32 35.94,12.32 31.24,7.62 24.89,7.62 23.88,8.64 21.84,8.64 21.08,7.87 9.53,7.87 8.51,8.89 8.51,11.43 9.4,12.32 13.46,12.32 14.48,13.34 16.76,13.34 17.14,13.72 17.14,17.14 16.7,17.59 U14.23
NRF_SWDCLK: length 105.2
  TOP w0.229: U14.26 18.47,19.49 v1(18.92,19.94) ; J6.4 38.99,6.98 38.23,6.22 37.34,6.22 36.83,5.71 36.83,3.43 v1(36.45,3.05) 35.94,3.56 v1(28.96,3.56) ; J5.8 51.1,30.73 v1(49.36,32.47) 48.67,33.17 U6.12
  BOTTOM w0.229: v1(18.92,19.94) 16.51,19.94 15.11,18.54 15.11,7.62 14.48,6.99 14.48,4.32 15.24,3.56 v1(28.96,3.56) ; v1(36.45,3.05) 37.47,4.06 48.39,4.06 53.98,9.65 53.98,27.86 v1(49.36,32.47)
NRF_SWDIO: length 90.7
  TOP w0.229: v1(28.96,4.45) 32.66,4.45 32.92,4.7 v1(35.94,4.7) 35.94,7.11 37.07,8.24 J6.2 ; U6.11 48.2,32.32 v1(49.02,31.5) 50.29,30.23 50.29,29.65 50.47,29.46 J5.6 ; U14.25 18.38,19.09 v1(18.92,18.54)
  BOTTOM w0.229: v1(18.92,18.54) 18.92,11.3 21.59,8.64 22.86,8.64 23.37,8.13 23.37,7.62 22.1,6.35 22.1,4.83 22.48,4.45 v1(28.96,4.45) ; v1(49.02,31.5) 53.21,27.3 53.21,10.29 48.51,5.59 36.83,5.59 v1(35.94,4.7)
NRF_TXD: length 62.4
  TOP w0.229: v1(22.61,7.87) 23.37,7.11 31.62,7.11 36.19,11.68 44.83,11.68 47.5,14.35 47.5,20.95 50.8,24.26 53.34,24.26 54.1,25.02 54.1,27.94 54.36,28.19 J5.3 ; U14.24 v1(17.86,18.34)
  BOTTOM w0.229: v1(22.61,7.87) 20.95,7.87 17.86,10.97 v1(17.86,18.34)
NRF_XTAL1: length 22.2
  TOP w0.229: X1.1 27.16,9.03 26.54,9.65 26.54,10.92 27.06,11.44 R31.1 C35.1 27.05,15.41 27.05,17.91 25.65,19.3 25.65,20.88 25.2,21.34 20.7,21.34 19.35,22.69 U14.34
NRF_XTAL2: length 22.6
  TOP w0.229: X1.3 29.86,10.71 R31.2 C36.1 29.86,17.26 29.46,17.65 28.07,17.65 26.16,19.56 26.16,21.08 25.4,21.84 20.95,21.84 19.71,23.09 U14.35
PGM_D+: length 59.7
  TOP w0.152: v1(34.42,39.62) 34.8,39.25 34.8,37.72 34.53,37.45 U6.24 ; J8.B7 J8.A6 27.9,76.9 27.81,76.81 27.81,76.14 v1(28.18,75.77)
  BOTTOM w0.152: v1(34.42,39.62) 34.86,40.06 34.86,43.62 30.35,48.13 26.56,48.13 19.57,55.13 19.57,65.29 20.64,66.36 20.64,73.28 25.27,77.91 27.06,77.91 27.81,77.16 27.81,76.14 v1(28.18,75.77)
PGM_D-: length 58.6
  TOP w0.152: J8.B6 J8.A7 27.4,76.9 27.49,76.81 27.49,76.14 v1(27.12,75.77) ; v1(35.49,39.62) 35.12,39.25 35.12,37.72 35.38,37.45 U6.23
  BOTTOM w0.152: v1(27.12,75.77) 27.49,76.14 27.49,77.03 26.92,77.6 25.4,77.6 20.95,73.15 20.95,66.23 19.89,65.16 19.89,55.26 26.69,48.45 30.48,48.45 35.18,43.76 35.18,39.94 v1(35.49,39.62)
POWER_D+: length 45.1
  TOP w0.152: v1(44.37,79.87) 44,79.5 44,78.83 44.09,78.74 J1.A6 J1.B7 ; v1(39.55,75.17) 39.18,74.79 39.18,73.53 29.78,64.13 29.78,58.81 30.42,58.17 30.42,56.83 30.62,56.63 v1(31.06,56.63)
  BOTTOM w0.152: v1(39.55,75.17) 39.18,75.54 39.18,75.76 41.08,77.66 42.86,77.66 44.07,78.87 44.07,79.57 v1(44.37,79.87) ; R9.1 R7.2 v1(31.06,56.63) 30.68,56.63 30.53,56.78 30.53,57 30.74,57.22 34.1,57.22 35.68,58.8 U2.24
POWER_D-: length 45.2
  TOP w0.152: J1.B6 J1.A7 43.59,78.74 43.68,78.83 43.68,79.5 v1(43.31,79.87) ; v1(38.49,75.17) 38.86,74.79 38.86,73.66 29.46,64.26 29.46,58.67 30.1,58.04 30.1,57.05 v1(29.74,56.69)
  BOTTOM w0.152: v1(38.49,75.17) 38.86,75.54 38.86,75.89 40.95,77.98 42.73,77.98 43.75,79 43.75,79.43 v1(43.31,79.87) ; R8.1 R6.2 28.65,55.6 v1(29.74,56.69) 29.77,56.69 30.61,57.53 33.97,57.53 35.45,59.02 U2.1
VLDO_3V3: length 94.8
  TOP w0.229: U14.47 U14.48 12.7,24.64 12.38,24.96 ; U14.22 v1(16.3,16.38) ; C27.1 22.1,23.49 U14.36 ; C28.1 U14.10
  TOP w0.381: C18.2 44.2,25.78 43.94,25.52 U6.3 ; v1(9.43,18.32) C28.1 ; 12.38,24.96 12,25.34 v1(10.54,25.34)
  TOP w0.508: v1(48.16,24.41) C20.2 C18.2 v1(45.72,24.38) ; v1(20.57,25.78) C25.1 C27.1 ; J6.1 37.72,2.16 38.1,1.78 48.51,1.78 50.8,4.06 50.8,5.46 53.72,8.38 55.63,8.38 57.91,10.67 v1(57.91,23.88) ; v1(16.3,16.38) 16.3,15.79 C24.1 ; R28.2 v1(14.9,32.89) ; C26.1 C23.1 v1(10.54,25.34) ; R29.2 v1(17.31,32.89) ; R46.2 v1(54.61,44.57)
  TOP w0.762: R24.1 41.91,48.26 v1(41.15,48.26) 34.16,48.26 32.72,46.81 U16.1 32.66,43.94 C72.2
  vias: v1(50.67,58.93) v1(50.67,57.4) v1(51.18,25.91) v1(52.58,25.91) v1(54.74,22.73) v1(55.37,25.78) v1(56.13,22.73) v1(56.64,25.78)
VREGN_DIV: length 14.6
  TOP w0.508: v1(33.43,64.47) 37.77,68.81 R14.2 R15.1
  BOTTOM w0.229: v1(33.43,64.47) 34.52,63.37 35.84,63.37 36.14,63.07 U2.7
VSW_3V3: length 31.2
  BOTTOM w1.016: R5.1 35.23,70.69 34.29,71.63 32.38,71.63 28.96,68.2 25.18,68.2 21.56,64.58 21.56,60.48 23.94,58.11 26.42,58.11 27.14,58.83 R4.1
VSW_4V0: length 22.8
  BOTTOM w0.508: U7.2 7.68,67.5 9.14,66.04 9.14,58.78 v1(15.32,52.6)
  vias: v1(18.36,52.6)
VSW_5V0: length 91.8
  TOP w0.762: v1(22.99,44.07) 29.21,50.29 29.21,51.18 30.35,52.32 30.35,53.72 30.99,54.36 C13.1 U3.7
  BOTTOM w1.016: U13.1 2.03,31.52 2.03,15.06 3.05,14.05 U15.1 v1(3.66,9.4) ; U13.1 9.55,39.04 D2.1 ; U13.1 6.48,39.88 6.48,44.83 7.75,46.1 21.59,46.1 22.99,44.7 v1(22.99,44.07) ; U8.1 37.59,11.64 37.59,8 34.25,4.66 34.25,2.37 v1(34.16,2.29)
  vias: v1(4.83,9.4) v1(22.99,42.67) v1(32.99,2.29) v1(38.23,13.97) v1(40.51,13.97)
VSYS:
  vias: v1(20.55,64.21) v1(20.55,62.64) v1(22.61,64.14) v1(39.12,63.86) v1(40.13,63.83) v1(48.01,50.29) v1(49.53,50.29) v1(51.18,68.33) v1(52.7,68.33)
VSYS_BC: length 5.3
  BOTTOM w0.229: U2.15 40.71,60.98 41.22,61.49 ; U2.16 39.96,60.48 40.02,60.54 40.48,60.54 40.54,60.48 40.85,60.48
  BOTTOM w0.254: v1(41.35,59.39) C8.1 ; U2.15 U2.16
  vias: v1(41.36,60.71)
WIFI_OFF: length 28.5
  TOP w0.229: U6.15 v1(43.53,35.72)
  BOTTOM w0.229: v1(43.53,35.72) 46.92,32.33 46.92,24.71 47.88,23.75 47.88,19.68 48.51,19.05 50.04,19.05 50.67,18.41 50.67,14.06 SW9.5
N489525: length 10.1
  BOTTOM w0.254: C4.2 38.3,57.3 38.2,57.4 ; 38.2,57.4 38.2,55.43 37.14,56.49 37.14,57.8 37.17,57.83 37.17,58.27 37.14,58.31 U2.22 U2.21 37.64,57.97 38.2,57.4
N489966: length 3.5
  BOTTOM w0.229: 40.41,59.82 40.25,59.98 U2.17
  BOTTOM w0.254: 39.65,58.75 39.32,59.08 U2.18 ; U2.18 39.96,59.48 40.18,59.26 40.26,59.26 ; U2.18 U2.17
N490283: length 23.8
  BOTTOM w0.229: 39.24,62.67 U2.12
  BOTTOM w0.508: 39.24,62.67 40.13,62.67 41.02,63.56 41.02,64.39 42.88,66.24 51.36,66.24 51.94,65.66 51.94,60.96 51.44,60.45 50.16,60.45 C5.2
N491328: length 5.7
  BOTTOM w0.229: U2.8 36.64,63.44 36.2,63.88 34.95,63.88 R10.1
N491337: length 4.8
  BOTTOM w0.229: R11.1 33.5,63.68 35.19,61.98 U2.6
N491346: length 3.4
  BOTTOM w0.229: R12.1 37.64,66.01 37.64,64.16 37.63,64.16 37.63,63.73 37.64,63.73 U2.10
N491858: length 6.8
  TOP w0.229: v1(38.66,64.69) 38.76,64.69 R14.1
  BOTTOM w0.229: U2.11 38.14,64.17 v1(38.66,64.69) 39.88,64.69 40.08,64.9 R14.1
N492759: length 4.5
  BOTTOM w0.229: R13.1 33.48,61.26 34.26,60.49 34.96,60.49 34.97,60.48 U2.3
N505904: length 3.3
  TOP w0.381: U3.1 R17.1
N533307: length 3.7
  BOTTOM w0.229: U8.2 40.38,9.78 41.01,9.15 U9.4
N533315: length 3.9
  BOTTOM w0.229: U9.2 45.57,15.19 46.17,15.79 U10.4
N536197: length 3.7
  BOTTOM w0.229: U11.4 39.81,21.02 40.41,20.42 U10.2
N548982: length 5.1
  TOP w0.229: U14.46 13.5,24.98 11.14,27.34 L2.1
N549115: length 14
  TOP w0.229: L2.2 12.84,27.17 13.9,26.1 U14.45
  TOP w0.508: v1(12.83,29.97) 12.83,28.33 L2.2
  BOTTOM w0.508: v1(12.83,29.97) 11.71,31.09 C29.1 FB1.1
N549518: length 31.9
  TOP w0.229: U14.33 18.73,22.29 v1(20.19,20.83) C31.1 ; v1(14.22,26.92) 14.48,26.67 14.48,25.18 14.7,24.95 U14.43
  BOTTOM w0.508: C32.1 C33.1 FB1.2 16.11,30.85 14.22,28.96 v1(14.22,26.92) 17.91,26.92 20.19,24.64 v1(20.19,20.83)
N550099: length 11
  TOP w0.229: R27.1 18.36,13.92 19.81,15.37 19.81,20.19 18.92,21.08 17.86,21.08 U14.30
N554154: length 5.7
  BOTTOM w0.229: R47.2 R23.1 U8.4
N742009: length 7
  BOTTOM w0.229: U13.2 9.55,43.31 D2.2 14.95,43.31 U12.3
N742588: length 3.2
  BOTTOM w0.229: U12.1 20.23,44.23 R26.2
N763037: length 3.2
  TOP w0.229: U7.5 R37.2
N763041: length 5.2
  TOP w0.229: R39.2 R42.2 U7.4
N763585: length 5.3
  TOP w0.229: U7.3 R43.2 R40.1
N878198: length 2.6
  TOP w0.508: U5.6 53.98,58.04 C74.1
N878334: length 9.5
  TOP w0.508: 55.24,56.29 55.24,54.48 56.39,53.34 56.39,47.63 R46.1

## Copper pours and planes (outline as drawn; the poured copper is in the pictures)
GND on TOP: 45.34,55.5 45.34,53.98 45.59,53.72 50.04,53.72 50.67,53.09 53.72,53.09 53.98,53.34 53.98,54.74 53.72,54.99 51.05,54.99 50.55,55.5
GND on TOP: 4.83,22.99 4.83,16.38 5.33,15.88 8.26,15.88 8.38,16 8.38,17.65 7.49,18.54 7.49,23.24 7.37,23.37 5.21,23.37
GND on TOP: 17.02,56.49 17.02,55.83 17.4,55.45 20.19,55.45 20.5,55.14 20.5,52.48 20.68,52.3 23.34,52.3 23.62,52.58 23.62,55.22 23.88,55.47 25.68,55.47 26.44,56.24 28.55,56.24 28.83,56.52 28.83,58.17 28.19,58.8 28.19,63.75 29.46,65.02 29.46,65.41 29.21,65.66 24.23,65.66 23.72,65.15 23.72,57.81 23.34,57.43 20.55,57.43 20.4,57.28 20.4,56.92 20.22,56.74 17.27,56.74
GND on TOP: 46.35,72.9 46.35,69.85 46.1,69.6 44.7,69.6 44.07,70.23 39.12,70.23 38.86,69.98 38.61,69.98 38.35,70.23 38.35,70.74 39.88,72.26 42.8,72.26 43.69,73.15 46.1,73.15
GND on TOP: 6.35,60.07 10.26,60.07 10.46,60.27 10.46,62.15 10.26,62.36 6.35,62.36 6.1,62.1 6.1,60.33
GND on TOP: 24.51,27.81 26.16,27.81 26.8,27.18 26.8,26.29 26.92,26.16 27.43,26.16 27.94,26.67 31.62,26.67 32.89,27.94 32.89,32.13 33.15,32.38 37.72,32.38 38.1,32 38.1,26.42 37.47,25.78 29.72,25.78 29.08,25.15 27.56,25.15 27.3,24.89 27.3,23.62 27.56,23.37 30.73,23.37 32.26,24.89 43.81,24.89 45.34,23.37 45.34,20.19 44.45,19.3 44.45,14.73 44.07,14.35 41.27,14.35 41.15,14.48 41.15,17.27 40.64,17.78 36.32,17.78 36.26,17.72 34.54,19.43 28.38,19.43 26.99,20.83 26.99,21.65 26.16,22.48 24.13,22.48 24,22.61 24,27.3
GND on TOP: 41.66,66.93 43.18,66.93 43.69,67.44 44.2,67.44 44.45,67.18 44.45,65.41 44.07,65.02 41.66,65.02 41.53,65.15 41.53,66.8
GND on TOP: 23.98,61.52 25.73,61.52 25.98,61.77 25.98,64.26 25.73,64.52 23.98,64.52 23.72,64.26 23.72,61.77
GND on TOP: 54.1,66.17 56.01,66.17 56.39,66.55 56.39,71.75 56.01,72.14 54.36,72.14 53.85,71.63 53.85,66.42
GND on TOP: 44.2,6.6 49.28,6.6 49.66,6.22 49.66,3.56 48.64,2.54 42.67,2.54 42.42,2.79 42.42,5.59 42.67,5.84 43.43,5.84
GND on TOP: 49.3,27.71 49.66,28.07 49.66,30.1 49.28,30.48 44.45,30.48 44.2,30.23 44.2,28.07 44.55,27.71
GND on TOP: 47.83,45.8 53.14,45.8 53.26,45.67 53.26,41.07 52.07,39.88 47.62,39.88 47.5,40.01 47.5,42.06 47.24,42.32 44.81,42.32 44.5,42.62 44.5,44.78 44.63,44.91 46.94,44.91
GND on TOP: 24.89,69.47 28.96,69.47 29.21,69.72 29.21,72.26 28.96,72.52 24.89,72.52 24.64,72.26 24.64,69.72
GND on TOP: 56.64,14.1 56.64,11.68 56.39,11.43 54.48,11.43 54.23,11.68 54.23,14.1 54.36,14.22 56.52,14.22
GND on TOP: 30.73,62.87 30.73,59.82 30.86,59.69 33.4,59.69 34.04,60.33 37.59,60.33 38.61,61.34 38.61,61.85 38.48,61.98 36.07,61.98 35.81,62.23 35.81,63.88 35.69,64.01 31.88,64.01
GND on TOP: 46.35,58.78 44.96,57.38 44.96,56.31 44.86,56.21 42.21,56.21 41.53,55.52 39.27,55.52 38.96,55.22 38.96,50.88 38.71,50.62 31.04,50.62 30.86,50.8 30.86,52.3 31.11,52.55 35.48,52.55 36.32,53.39 36.32,55.02 35.89,55.45 33.96,55.45 33.83,55.58 33.83,56.69 33.93,56.79 35.66,56.79 36.4,57.53 38.73,57.53 38.91,57.71 38.91,58.24 39.29,58.62 41.61,58.62 42.8,59.82 46.1,59.82 46.35,59.56
GND on BOTTOM: 32.51,53.21 32.51,50.93 32.89,50.55 39.24,50.55 39.5,50.8 39.5,53.34 39.37,53.47 32.77,53.47
GND on BOTTOM: 49.91,55.12 49.91,53.72 50.42,53.21 52.96,53.21 53.21,52.96 53.72,52.96 53.98,53.21 53.98,55.12 53.59,55.5 50.29,55.5
GND on BOTTOM: 27.18,53.34 27.18,50.8 27.05,50.67 25.4,50.67 25.27,50.8 25.27,53.34 25.4,53.47 27.05,53.47
GND on BOTTOM: 43.69,64.39 43.69,58.55 43.81,58.42 45.59,58.42 46.1,58.93 46.1,64.14 45.72,64.52 43.81,64.52
GND on BOTTOM: 33.78,70.48 33.78,68.07 33.66,67.94 31.24,67.94 30.99,68.2 30.99,69.09 32.64,70.74 33.53,70.74
GND on BOTTOM: 20.57,32.89 23.11,32.89 23.37,33.15 23.37,39.12 23.11,39.37 20.57,39.37 20.32,39.12 20.32,33.15
GND on BOTTOM: 29.84,72.31 25.12,72.31 24.87,72.06 24.87,69.88 25.15,69.6 29.08,69.6 29.97,70.48 29.97,72.19
GND on BOTTOM: 29.59,8.61 29.34,8.86 29.34,10.67 29.72,11.05 31.88,11.05 32.64,11.81 33.02,11.81 34.32,10.52 35.05,10.52 35.18,10.39 35.18,9.12 34.67,8.61
GND on BOTTOM: 45.95,72.31 37.24,72.31 36.65,71.73 36.65,68.02 36.78,67.89 44.78,67.89 46.35,69.47 46.35,71.91
GND on BOTTOM: 29.59,65.15 29.59,60.33 29.21,59.94 27.3,59.94 26.16,58.8 24.51,58.8 23.75,59.56 23.75,65.02 24.26,65.53 29.21,65.53
GND on GND: 1.52,83.64 58.47,83.64 58.47,1.52 1.52,1.52 ; 1 cut-out
GND on GND/PWR: 1.52,83.64 58.47,83.64 58.47,1.52 1.52,1.52
VBAT on TOP: 13.69,64.39 13.69,66.42 13.87,66.6 17.17,66.6 17.42,66.34 17.42,64.44 17.22,64.24 13.84,64.24
VBAT on GND: 13.46,66.29 13.46,48.64 16.38,45.72 38.23,45.72 41.78,49.28 41.78,63.25 41.4,63.63 41.02,63.63 40.39,62.99 39.75,62.99 39.37,62.61 39.37,52.32 35.81,48.77 27.56,48.77 17.78,58.55 17.78,66.55 17.53,66.8 13.97,66.8
VBAT_CONN on TOP: 6.12,63.4 6.12,64.64 6.43,64.95 12.52,64.95 12.7,64.77 12.7,63.42 12.5,63.22 6.3,63.22
VBUS on TOP: 45.91,78.36 45.91,76.26 45.59,75.95 43.31,75.95 42.93,75.56 42.93,75.54 42.55,75.16 41.81,75.16 41.66,75.31 41.66,76.2 41.78,76.33 41.78,78.36 41.66,78.49 41.27,78.49 41.15,78.36 41.15,77.09 40.51,76.45 40.51,73.66 40.82,73.36 42.67,73.36 42.85,73.53 46.13,73.53 46.99,74.4 46.99,76.26 46.54,76.71 46.54,78.38 46.52,78.41 45.96,78.41
VBUS on BOTTOM: 32.03,53.34 32.03,50.22 31.6,49.78 28.17,49.78 27.64,50.32 27.64,53.31 27.79,53.47 31.9,53.47
VBUS on GND: 48.13,75.69 48.13,68.58 47.37,67.82 39.75,67.82 37.85,65.91 37.85,58.8 33.27,54.23 33.27,50.16 32.64,49.53 28.57,49.53 27.69,50.42 27.69,54.1 29.21,55.63 31.24,55.63 33.53,57.91 33.53,65.15 44.32,75.95 47.88,75.95
VBUS_USB2 on TOP: 29.72,78.36 29.72,75.74 29.13,75.16 26.37,75.16 26.21,75.01 26.21,74.68 26.01,74.47 26.01,74.04 26.21,73.84 26.21,73.46 26.31,73.36 28.24,73.36 28.27,73.38 30.2,73.38 30.71,73.89 30.71,75.79 30.35,76.15 30.35,78.38 30.33,78.41 29.77,78.41
ESP_EN_4V0 on TOP: 19.68,58.78 19.68,57.33 19.58,57.23 16.94,57.23 16.74,57.02 14.81,57.02 14.68,57.15 14.68,58.75 14.81,58.88 19.58,58.88
ESP_EN_5V0 on TOP: 35.36,58.75 35.36,57.38 35.31,57.33 32.72,57.33 32.49,57.1 30.78,57.1 30.73,57.15 30.73,58.67 30.94,58.88 35.23,58.88
VLDO_3V3 on TOP: 54.48,20.19 56.26,20.19 56.52,20.45 56.52,22.99 56.26,23.24 54.48,23.24 54.23,22.99 54.23,20.45
VLDO_3V3 on TOP: 53.09,59.44 53.09,55.63 52.96,55.5 50.8,55.5 50.29,56.01 50.29,59.18 50.55,59.44
VLDO_3V3 on TOP: 50.8,25.53 53.34,25.53 53.59,25.78 53.59,27.05 53.34,27.3 50.8,27.3 50.55,27.05 50.55,25.78
VLDO_3V3 on TOP: 54.99,25.53 57.4,25.53 57.66,25.78 57.66,27.05 57.4,27.3 54.99,27.3 54.74,27.05 54.74,25.78
VLDO_3V3 on GND: 14.1,33.4 40.39,33.4 40.89,33.91 40.89,39.62 38.86,41.66 32.64,41.66 31.11,43.18 31.11,44.96 33.02,46.86 40.39,46.86 42.16,48.64 50.42,48.64 50.67,48.9 50.67,54.48 50.04,55.12 50.04,59.31 50.42,59.69 55.5,59.69 58.29,56.9 58.29,21.97 57.02,20.7 54.1,20.7 52.58,22.23 21.84,22.23 20.07,24 17.4,24 16.64,23.24 16.64,14.86 15.75,13.97 13.72,13.97 13.34,14.35 13.34,18.03 13.46,18.16 13.46,19.3 13.08,19.68 11.81,19.68 9.91,17.78 8.89,17.78 8.64,18.03 8.64,19.94 9.53,20.83 11.43,20.83 11.43,23.5 10.03,24.89 10.03,29.34
VSW_4V0 on TOP: 6.86,72.59 6.86,70.43 6.83,70.43 6.71,70.31 5.03,70.31 4.93,70.21 4.93,68.35 5.08,68.2 8.1,68.2 8.53,68.63 8.53,72.72 8.23,73.03 7.29,73.03
VSW_4V0 on TOP: 14.88,55.14 14.88,52.48 15.06,52.3 19.35,52.3 19.63,52.58 19.63,54.86 19.56,54.94 17.12,54.94 16.74,55.32 15.06,55.32
VSW_5V0 on TOP: 40.12,15.48 40.08,15.52 40.08,16.43 40.01,16.51 37.97,16.51 37.85,16.38 37.85,13.72 37.97,13.59 40.77,13.59 40.89,13.72 40.89,14.1 40.12,14.87
VSW_5V0 on TOP: 6.6,8.76 12.45,2.92 34.29,2.92 34.67,2.54 34.67,1.52 34.42,1.27 12.19,1.27 5.33,8.13 3.56,8.13 2.41,9.27 2.41,14.73 2.67,14.99 8,14.99 8.26,14.73 8.26,13.34 6.6,11.68
VSW_5V0 on BOTTOM: 22.73,42.16 23.37,42.16 23.62,42.42 23.62,44.2 23.37,44.45 22.73,44.45 22.48,44.2 22.48,42.42
VSW_5V0 on BOTTOM: 3.17,9.53 3.17,9.02 3.43,8.76 5.21,8.76 5.46,9.02 5.46,9.53 5.21,9.78 3.43,9.78
VSW_5V0 on BOTTOM: 32.51,2.41 32.51,1.91 32.77,1.65 34.54,1.65 34.8,1.91 34.8,2.41 34.54,2.67 32.77,2.67
VSW_5V0 on BOTTOM: 42.9,14.5 42.9,12.83 42.55,12.47 38.07,12.47 37.82,12.73 37.82,17.46 38.13,17.77 42.24,17.77 42.42,17.59 42.42,14.99
VSYS on TOP: 51.05,66.04 52.96,66.04 53.21,66.29 53.21,68.33 52.96,68.58 51.05,68.58 50.8,68.33 50.8,66.29
VSYS on TOP: 38.43,59.31 38.43,58.62 38.18,58.37 37.13,58.37 37.01,58.5 37.01,59.94 37.13,60.07 37.59,60.07 38.73,61.21 38.73,61.98 38.61,62.1 36.96,62.1 36.83,62.23 36.83,64.01 37.01,64.19 40.46,64.19 40.64,64.01 40.67,64.01 40.67,60.22 39.88,59.44 38.56,59.44
VSYS on TOP: 20.85,61.29 20.85,58.55 21.06,58.34 22.56,58.34 22.78,58.57 22.78,63.63 22.99,63.83 22.99,64.39 22.83,64.54 20.45,64.54 20.22,64.31 20.22,61.93
VSYS on TOP: 47.75,48.26 47.24,48.77 47.24,50.42 46.86,50.8 45.47,50.8 45.34,50.93 45.34,52.58 45.47,52.7 50.16,52.7 51.05,51.82 54.23,51.82 54.36,51.69 54.36,48.64 53.98,48.26
VSYS on BOTTOM: 52.83,52.07 52.83,50.04 52.58,49.78 47.88,49.78 47.62,50.04 47.62,52.07 47.75,52.2 52.7,52.2
VSYS on GND: 23.11,61.85 20.19,61.85 19.94,62.1 19.94,72.39 21.72,74.17 32.38,74.17 33.91,75.69 33.91,80.26 35.31,81.66 39.88,81.66 41.27,83.06 46.23,83.06 47.75,81.53 49.91,81.53 52.45,78.99 52.45,62.99 49.53,60.07 49.53,55.12 50.16,54.48 50.16,49.91 49.66,49.4 42.55,49.4 42.42,49.53 42.42,62.87 41.53,63.75 40.77,63.75 40.26,63.25 39.12,63.25 38.48,63.88 38.48,65.53 40.13,67.18 49.4,67.18 50.04,67.82 50.04,78.61 48.77,79.88 45.97,79.88 45.34,80.52 41.78,80.52 40.89,79.63 38.35,79.63 37.08,78.36 37.08,75.06 32.89,70.87 24.77,70.87 23.5,69.6 23.5,62.23
VSYS_BC on TOP: 52.96,72.52 52.96,69.34 52.7,69.09 50.8,69.09 50.29,68.58 50.29,68.2 49.15,67.06 48.01,67.06 46.48,65.53 46.48,64.01 41.53,59.05 41.15,59.05 41.02,59.18 41.02,61.21 44.83,65.02 44.83,67.06 47.88,70.1 49.02,70.1 51.69,72.77 52.7,72.77
VSYS_BC on BOTTOM: 43.23,62.28 43.23,58.6 43.15,58.52 41.61,58.52 41.02,59.11 41.02,60.05 40.82,60.25 40.82,61.65 41.45,62.28
N489525 on BOTTOM: 36.93,58.01 37.08,58.17 37.8,58.17 38.61,57.35 39.24,57.35 40.92,55.68 40.92,52.65 41.71,51.87 45.06,51.87 45.24,51.69 45.24,49.2 45.14,49.1 40.64,49.1 39.88,49.86 39.88,53.98 39.42,54.43 37.39,54.43 37.24,54.58 37.24,56.18 36.93,56.49
N489966 on BOTTOM: 49.91,57.4 50.04,57.28 50.04,55.5 49.58,55.04 41.73,55.04 41.48,55.3 41.48,56.08 39.42,58.14 39.42,60.02 39.47,60.07 40.44,60.07 40.79,59.72 40.79,58.8 42.06,57.53 46,57.53 46.13,57.4
N505816 on TOP: 24.18,54.91 26.72,54.91 26.95,55.14 28.7,55.14 28.7,55.12 28.83,54.99 28.83,53.49 28.7,53.37 24.33,53.37 24.08,53.62 24.08,54.81
N569514 on TOP: 46.99,65.28 50.16,65.28 50.42,65.02 55.63,65.02 56.13,65.53 57.53,65.53 57.78,65.28 57.78,64.52 57.28,64.01 56.39,64.01 55.5,63.12 51.18,63.12 50.16,62.1 47.12,62.1 46.74,62.48 46.74,65.02
N570476 on TOP: 50.93,20.83 50.93,12.32 51.56,11.68 53.21,11.68 53.85,12.32 53.85,14.86 54.36,15.37 56.52,15.37 56.9,15.75 56.9,18.54 56.39,19.05 54.1,19.05 53.72,19.43 53.72,21.08 53.34,21.46 51.56,21.46
N633379 on TOP: 14.68,63.32 14.68,62.18 14.05,61.54 14.05,59.87 13.92,59.74 12.06,59.74 11.99,59.82 11.99,61.67 13.74,63.42 14.58,63.42
N763595 on TOP: 9.4,52.12 9.4,49.76 9.65,49.5 10.87,49.5 11.25,49.89 11.25,53.98 11.13,54.1 8.1,54.1 7.9,53.9 7.9,52.5 8.08,52.32 9.19,52.32

## Text on the board
Package Geometry/Pastemask Bottom: PASTEMASK_BOTTOM
Ref Des/Silkscreen Bottom: SILKSCREEN_BOTTOM | VDD | VO | GND | 2 | 1 | BLE | VCC | RST | RX | TX | LED | GSM | WIFI
Board Geometry/Soldermask Top: SOLDER_MASK_TOP
Ref Des/Silkscreen Top: GND | + | - | VBAT | TXD0 | RXD0 | VBUS2 | VDD | SDCLK | SWD | SWDCLK | VBUS1 | RX | VSYS_BC | VSYS | TX | SCL | SDA | GPIO | RST | BLE_A
GND: GND
GND/PWR: GND/PWR
DISPLAY_TOP: ASSEMBLY_TOP
TOLERANCE_TOP: FAB_DRAWING | 2.FOUR LAYER, 1.6MM PCB THICKNESS, NO IMPEDANCE CONTROL | NOTES: | 1.BOARD DIMENSIONS ARE IN MM
